# Altium PCB nrf52832_qfax_nfc.PcbDoc
Units mil, origin at the board's own origin, x right, y up, seen from the top; angles counter-clockwise.
Board outline 700 x 697 mil, 2 copper layers (Top Layer, Bottom Layer), stack 65.8 mil thick; 23 components, 46 nets, 96 pads, 61 vias.
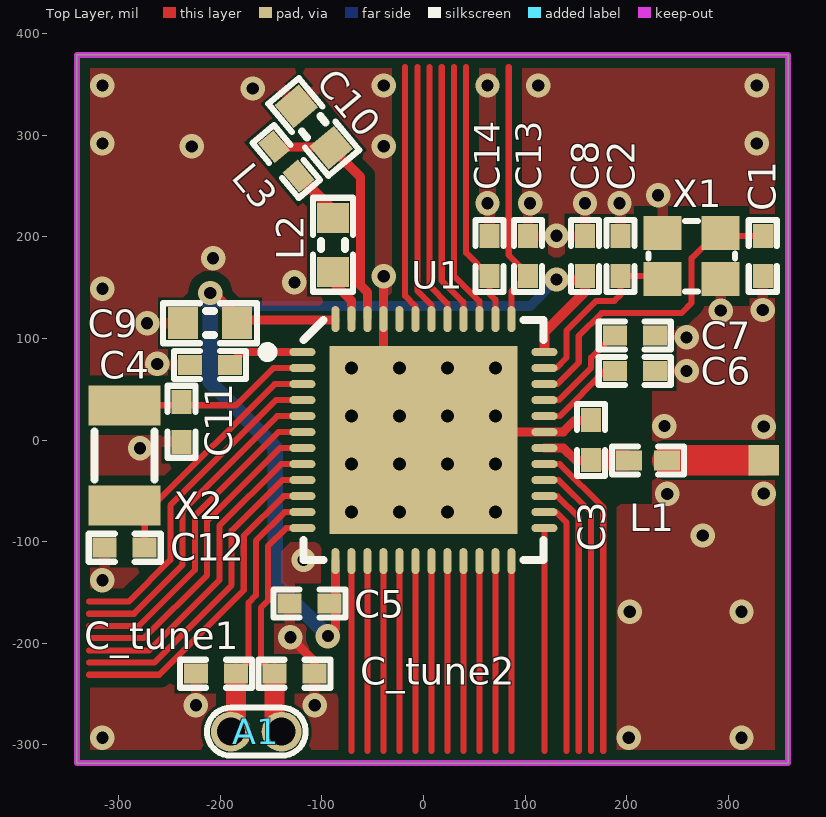
[diagram p0: Top Layer view]
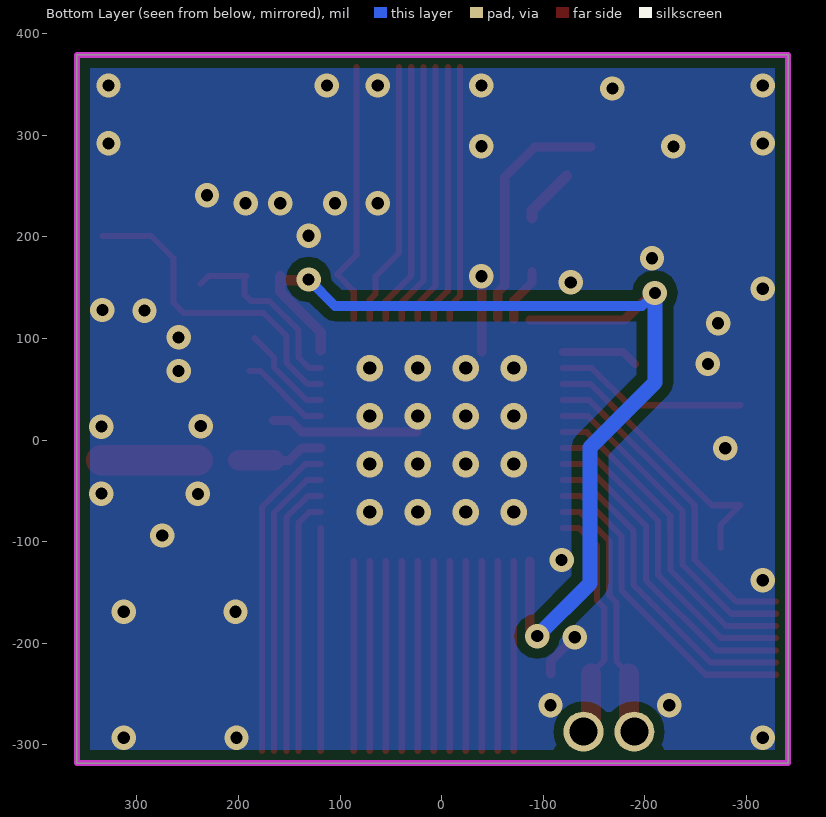
[diagram p1: Bottom Layer view, seen from below]
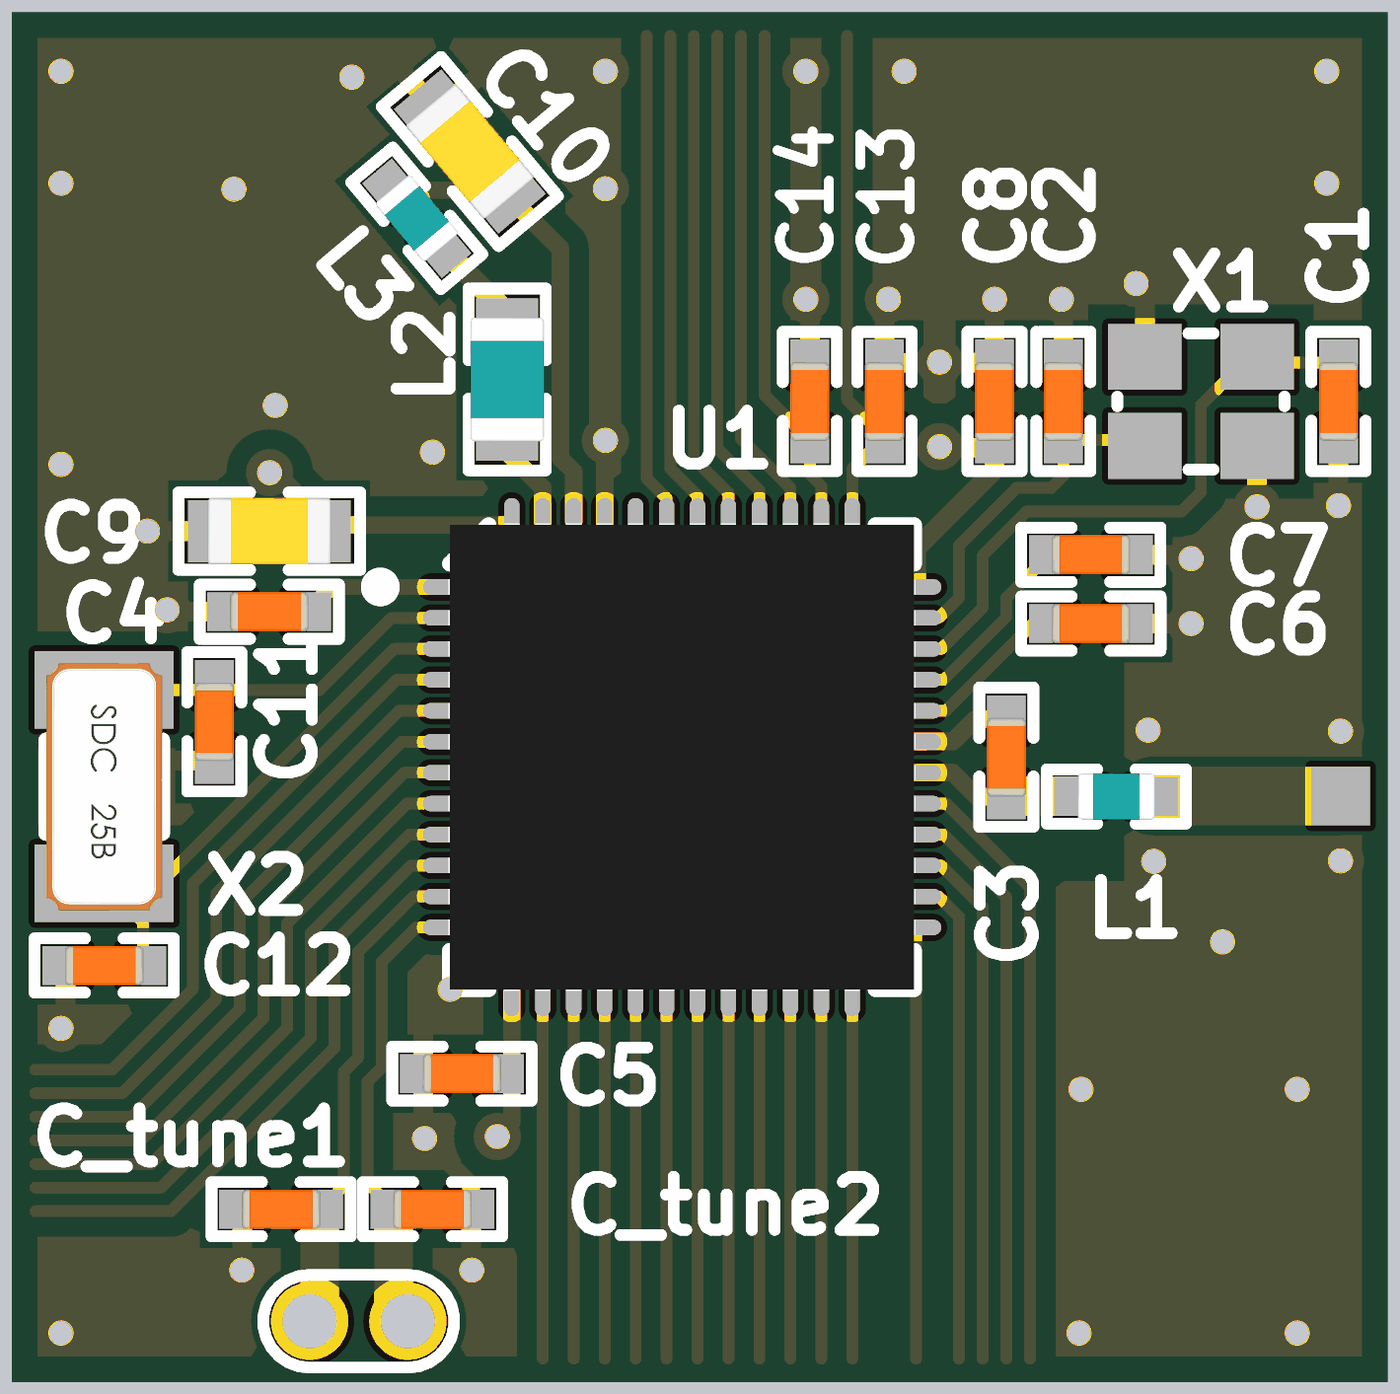
[diagram p2: 3D render of the assembled board from above, using the file's embedded part models]

## Layer stack, top to bottom
Top Solder: solder mask 0.4, Solder Resist, Dk 3.5
Top Layer: signal copper 1.4
Dielectric1: core 63, FR-4, Dk 4.8
Bottom Layer: signal copper 1.4
Bottom Solder: solder mask 0.4, Solder Resist, Dk 3.5

## Board outline
-341,-318 -341,379 359,379 359,-318

## Design rules (kind name [scope] priority, off if disabled: settings)
Clearance Polygon_ANT [(InNamedPolygon('Top_Layer-GND')) or (InNamedPolygon('Bottom_Layer-GND')) vs InNet('RF')] p1: gap=5
Clearance Polygon [(InNamedPolygon('Top_Layer-GND')) or (InNamedPolygon('Bottom_Layer-GND'))] p2: gap=10
Clearance [All] p3: gap=6
ComponentClearance [All] p1 off: gap=10 collisioncheckmode=3 verticalgap=10 showdistances=FALSE
FabricationTestPointUsage TestPointUsage [All] p1: valid=0 allowmultiple=FALSE
FabricationTestpoint Testpoint [All] p1: side=3 testpointundercomponent=TRUE minsize=40 maxsize=100 preferedsize=60 minholesize=0 maxholesize=40 preferedholesize=32 testpointgrid=1 allowsidetop=TRUE allowsidebottom=TRUE usegrid=TRUE gridtolerance=0.01
Height [All] p1 off: minheight=0 maxheight=1000 prefheight=500
HoleSize [All] p1: absolutevalues=TRUE maxlimit=160 minlimit=11.81 maxpercent=80.000 minpercent=20.000
MinimumAnnularRing [All] p1 off: minimumring=6
PolygonConnect PolygonConnect_1 [isVia and innet(gnd)] p1: connectstyle=Direct reliefconductorwidth=10 reliefentries=4 polygonreliefangle="90 Angle" airgapwidth=10
PolygonConnect [All] p2: connectstyle=Relief reliefconductorwidth=10 reliefentries=4 polygonreliefangle="90 Angle" airgapwidth=10
RoutingVias [All] p1: holewidth=16 width=32 viastyle="Through Hole" minholewidth=10 minwidth=10 maxholewidth=28 maxwidth=50
ShortCircuit ShortCircuit_NFC_ANT [InNet('NFC1') vs InNet('NFC2')] p1: allowed=TRUE
ShortCircuit [All] p2: allowed=FALSE
SilkToSolderMaskClearance SilkscreenOverComponentPads [IsPad] p1: minsilkscreentomaskgap=10 clearancetoexposedcopper=TRUE
SolderMaskExpansion [All] p1: expansion=3
Width [All] p1: maxlimit=100 minlimit=6 preferedwidth=6
23 further rules are at their usual default settings.

## Components (designator, comment, footprint, x,y, rotation, side; value= is the part's Value field where it differs from the comment)
A1 "NFC Antenna" TP_2x1mm_TH -164.5,-287 r90 top
C1 "12pF" CAPC1005X04L 333.99,181.01 r270 top
C2 "12pF" CAPC1005X04L 193.99,181.01 r90 top
C3 "0.8pF" CAPC1005X04L 165,0 r270 top
C4 "100nF" CAPC1005X04L -210,74 r180 top
C5 "100nF" CAPC1005X04L -112,-161 r180 top
C6 "N.C." CAPC1005X04L 208,68 r180 top
C7 "100pF" CAPC1005X04L 208,103 r0 top
C8 "100nF" CAPC1005X04L 158.99,181.01 r90 top
C9 "4.7µF" CAPC1608X06L -210,115 r180 top
C10 "1.0µF" CAPC1608X06L -107.97,308.2 r310 top
C11 "12pF" CAPC1005X04L -238,18 r270 top
C12 "12pF" CAPC1005X04L -294,-106 r180 top
C13 "12pF" CAPC1005X04L 103,181.01 r90 top
C14 "12pF" CAPC1005X04L 65,181.01 r90 top
C_tune1 "TBD" CAPC1005X04L -204,-230 r180 top
C_tune2 "TBD" CAPC1005X04L -127,-230 r180 top
L1 "3.9nH" INDC1005X04L 221,-20 r0 top
L2 "10µH" INDC1608X06L -89,192.2 r270 top
L3 "15nH" INDC1005X04L -134.97,274.2 r310 top
U1 "nRF52832-QFAA" QFN40P600X600X90-48N 0,0 r0 top locked
X1 "32MHz" BT-XTAL_2016 263.99,181.01 r180 top
X2 "32.768kHz" XTAL_3215 -294,-15 r270 top

## Footprints (in the part's own frame and the unit in brackets; to place one, negate y for a bottom-side part, rotate by r counter-clockwise, add the part's x,y. Pads: shape width x height; smd on the part's side, far side on the other; paste and mask are expansions set on the pad)
BT-XTAL_2016 [mm] "Crystal 2.0 x 1.6 mm"
  rect 0.95x0.85 smd: 1(-0.725,-0.575) 2(0.725,-0.575) 3(0.725,0.575) 4(-0.725,0.575)
  silkscreen extent -1.08,-0.88 1.08,0.88
CAPC1005X04L [mm] "Chip Capacitor, 2-Leads, Body 1.0x0.5mm, IPC High Density"
  rect 0.6x0.5 smd: 1(-0.5,0) 2(0.5,0)
  silkscreen extent -0.9,-0.35 0.9,0.35, body extent -0.51,-0.25 0.51,0.25, height 0.5
CAPC1608X06L [mm] "Chip Capacitor, 2-Leads, Body 1.6x0.8mm, IPC High Density"
  rect 0.75x0.8 smd: 1(-0.675,0) 2(0.675,0)
  silkscreen extent -1.17,-0.5 1.17,0.5, body extent -0.8,-0.43 0.8,0.43, height 0.8
INDC1005X04L [mm] "Chip Inductor, 2-Leads, Body 1.0x0.5mm, IPC High Density"
  rect 0.65x0.5 smd: 1(-0.475,0) 2(0.475,0)
  silkscreen extent -0.9,-0.35 0.9,0.35, body extent -0.5,-0.3 0.5,0.3, height 0.5
INDC1608X06L [mm] "Chip Inductor, 2-Leads, Body 1.6x0.8mm, IPC High Density"
  rect 0.75x0.8 smd: 1(-0.675,0) 2(0.675,0)
  silkscreen extent -1.18,-0.5 1.17,0.5, body extent -0.8,-0.48 0.8,0.48, height 0.8
QFN40P600X600X90-48N [mm] "QFN, 48-Leads, Body 6,0x6,0mm (max), Pitch 0,40mm, IPC Medium Density"
  oval 0.65x0.2 smd: 1(-3.025,2.2) 2(-3.025,1.8) 3(-3.025,1.4) 4(-3.025,1) 5(-3.025,0.6) 6(-3.025,0.2) 7(-3.025,-0.2) 8(-3.025,-0.6) 9(-3.025,-1) 10(-3.025,-1.4) 11(-3.025,-1.8) 12(-3.025,-2.2) 25(3.025,-2.2) 26(3.025,-1.8) 27(3.025,-1.4) 28(3.025,-1) 29(3.025,-0.6) 30(3.025,-0.2) 31(3.025,0.2) 32(3.025,0.6) 33(3.025,1) 34(3.025,1.4) 35(3.025,1.8) 36(3.025,2.2)
  oval 0.2x0.65 smd: 13(-2.2,-3.025) 14(-1.8,-3.025) 15(-1.4,-3.025) 16(-1,-3.025) 17(-0.6,-3.025) 18(-0.2,-3.025) 19(0.2,-3.025) 20(0.6,-3.025) 21(1,-3.025) 22(1.4,-3.025) 23(1.8,-3.025) 24(2.2,-3.025) 37(2.2,3.025) 38(1.8,3.025) 39(1.4,3.025) 40(1,3.025) 41(0.6,3.025) 42(0.2,3.025) 43(-0.2,3.025) 44(-0.6,3.025) 45(-1,3.025) 46(-1.4,3.025) 47(-1.8,3.025) 48(-2.2,3.025)
  rect 4.7x4.7 smd: 49(0,0)
  silkscreen extent -4.02,-3 3,3, body extent -3.02,-3.02 3.02,3.02, height 0.86
TP_2x1mm_TH [mm]
  round 1 hole 0.7: 1(0,-0.635) 2(0,0.635)
  silkscreen extent -0.6,-1.23 0.6,1.23
XTAL_3215 [mm] "XTAL SMD 3.2 x 1.5 mm"
  rect 1x1.8 smd: 1(-1.25,0) 2(1.25,0)
  silkscreen extent -0.6,-0.75 0.6,0.75, body extent -1.6,-0.75 1.6,0.75, height 0.81

## Part data
A1: library part NFC_ANT_TP
C1 C2 C11 C12 C13 C14: library part C0402-12p, "Capacitor, NP0, ±2%"
C3: library part C0402-0.8p, "Capacitor, NP0, ±5%"
C4 C5 C8: library part C0402-100n, "Capacitor, X7R, ±10%"
C6: library part C0402-N.C., "Not mounted"
C7: library part C0402-100p, "Capacitor, NP0, ±5%"
C9: library part C0603-4µ7, "Capacitor, X5R, ±10%"
C10: library part C0603-1µ0, "Capacitor, X7R, ±10%"
C_tune1 C_tune2: library part C0402-TBD, "Capacitor, NP0, ±5%"
L1: library part L0402-3n9, "High frequency chip inductor ±5%"
L2: library part L0603-10µ, "Chip inductor, IDC,min = 50 mA, ±20%"
L3: library part L0402-15n, "High frequency chip inductor ±10%"
U1: "Multi-protocol Bluetooth Low Energy, ANT and 2.4GHz proprietary system-on-chip"
X1: library part XTAL_SMD2016_32MHz_8pF_General, "XTAL SMD 2016, 32MHz, Cl=8pF, Total Tol: ±40ppm"
X2: library part XTAL_SMD3215_32.768kHz_9pF_General, "XTAL SMD 3215, 32.768kHz, Cl=9pF, Total Tol: ±50ppm"

## Free pads (board coordinates)
  rect 30x30 smd: 0(335,-19.75)

## Via types
v1: diameter 24, hole 12, Top Layer to Bottom Layer, tented both sides, 45 vias
v2: diameter 25.98, hole 12.99, Top Layer to Bottom Layer, tented both sides, 16 vias

## Nets (pads, with @x,y where several pads share a name; then routed paths per layer and width w, separated by ;. In a path a pad name is that pad's centre, name@x,y a point inside that pad or via, vN(x,y) a via of type N, cw(c..) or ccw(c..) an arc to the next point about the centre after c; other vN are vias at no path point)
DEC1: C4.1 U1.1 | length 76
  Top Layer w8: C4.1@-190.16,74.76 -178.31,86.61 U1.1
DEC2: C6.2 U1.32 | length 88.3
  Top Layer w6: U1.32 134.3,23.62 178.67,68 C6.2@189,68
DEC3: C7.1 U1.33 | length 96
  Top Layer w6: U1.33 133.07,39.37 165,71.3 165,81.19 C7.1@184.06,100.25
DEC4: C10.2 L3.1 U1.46 | length 237.8
  Top Layer w9: L3.1 C10.2@-91.57,288.53 ; C10.2 -62,258.95 -62,152.2 -55.12,145.32 U1.46@-55.12,120.3
GND: C1.2 C2.2 C3.1 C4.2 C5.2 C6.1 C7.2 C8.2 C9.2 C10.1 C11.2 C12.2 C13.2 C14.2 C_tune1.2 C_tune2.1 U1.31 U1.45 U1.49 X1.2 X1.4 | length 266.1
  Top Layer w9: v1(-131,-194) -107.32,-217.69 C_tune2.1 ; U1.49@-39.37,86.61 U1.45 v1@-39.37,161.2 ; U1.49@24.31,8 137.77,8 149.06,19.3 C3.1@165.31,19.3
  other v1: -316,-293 202,-293 313,-293 -224,-261 -107,-261 203,-169 313,-169 -316,-138 -118,-118.11 275,-94 240,-53 335,-52.75 -279,-8 335,13.25 237.16,13.76 259,68 -262,75 259,101 -272,115 292.54,127.37 334,128 -316,149 -127,155.2 -39,161.2 -207,179 130.99,201.01 63,233 105,233 159,233 193,233 231,241.01 -228,289 -39,289.2 -316,292 328,292 -168,346 -316,349 -39,349 63,349 113,349 328,349
  other v2: -70.87,-70.87 -23.62,-70.87 23.62,-70.87 70.87,-70.87 -70.87,-23.62 -23.62,-23.62 23.62,-23.62 70.87,-23.62 -70.87,23.62 -23.62,23.62 23.62,23.62 70.87,23.62 -70.87,70.87 -23.62,70.87 23.62,70.87 70.87,70.87
NetC3_2: C3.2 L1.1 U1.30 | length 86.6
  Top Layer w9: U1.30 137.79,-7.87 149.99,-20.07 C3.2@165.32,-20.07
  Top Layer w20: C3.2@165,-19.87 L1.1@200.31,-19.87
NetL2_1: L2.1 L3.2 | length 55.2
  Top Layer w11: L3.2 -89,225.92 L2.1
NetL2_2: L2.2 U1.47 | length 54
  Top Layer w9: L2.2 -89,155.2 -70.87,137.07 U1.47
NFC1: A1.2 C_tune1.1 U1.11 | length 255.4
  Top Layer w6: C_tune1.1@-184.01,-230.01 -172,-218 -172,-159.97 -164.85,-152.82 -164.85,-144 -164.85,-99.25 -136.47,-70.87 U1.11
  Top Layer w19.68: A1.2 -184.32,-281.82 C_tune1.1
NFC2: A1.1 C_tune2.2 U1.12 | length 235.3
  Top Layer w6: C_tune2.2 -160,-216.69 -160,-165 -152.85,-157.85 -152.85,-104.22 -135.25,-86.61 U1.12
  Top Layer w19.69: C_tune2.2 -146.69,-279.81 A1.1
P0.00/XL1: C11.1 U1.2 X2.1 | length 190.1
  Top Layer w6: X2.1 -184.36,34.21 -147.71,70.87 U1.2
P0.01/XL2: C12.1 U1.3 X2.2 | length 274.3
  Top Layer w6: C12.1 -274.32,-83.9 X2.2 -265.82,-64.21 -146.49,55.12 U1.3
P0.02/AIN0: U1.4 | length 323.5
  Top Layer w6: -329,-159 -290,-159 -249,-118 -249,-64.39 -145.24,39.37 U1.4
P0.03/AIN1: U1.5 | length 321.9
  Top Layer w6: -329,-171 -285.03,-171 -236.98,-122.95 -236.98,-69.37 -143.98,23.62 U1.5
P0.04/AIN2: U1.6 | length 320.3
  Top Layer w6: -329,-183 -280.06,-183 -224.98,-127.92 -224.98,-91.02 -224.96,-74.35 -142.73,7.87 U1.6
P0.05/AIN3: U1.7 | length 318.7
  Top Layer w6: -329,-195 -275.09,-195 -212.98,-132.89 -212.98,-100.12 -212.85,-100 -212.85,-79.37 -141.36,-7.87 U1.7
P0.06: U1.8 | length 317.2
  Top Layer w6: -329,-207 -270,-207 -200.85,-137.85 -200.85,-84.34 -140.14,-23.62 U1.8
P0.07: U1.9 | length 315.7
  Top Layer w6: -329,-219 -265,-219 -188.85,-142.85 -188.85,-89.31 -138.92,-39.37 U1.9
P0.08: U1.10 | length 314.1
  Top Layer w6: -329,-231 -260,-231 -176.85,-147.85 -176.85,-94.28 -137.7,-55.12 U1.10
P0.11: U1.14 | length 186.9
  Top Layer w6: -70.87,-306 U1.14
P0.12: U1.15 | length 186.9
  Top Layer w6: -55.12,-306 U1.15
P0.13: U1.16 | length 186.9
  Top Layer w6: -39.37,-306 U1.16
P0.14: U1.17 | length 186.9
  Top Layer w6: -23.62,-306 U1.17
P0.15: U1.18 | length 186.9
  Top Layer w6: -7.87,-306 U1.18
P0.16: U1.19 | length 186.9
  Top Layer w6: 7.87,-306 U1.19
P0.17: U1.20 | length 186.9
  Top Layer w6: 23.62,-306 U1.20
P0.18: U1.21 | length 186.9
  Top Layer w6: 39.37,-306 U1.21
P0.19: U1.22 | length 186.9
  Top Layer w6: 55.12,-306 U1.22
P0.20: U1.23 | length 186.9
  Top Layer w6: 70.87,-306 U1.23
P0.21: U1.24 | length 186.9
  Top Layer w6: 86.61,-306 U1.24
P0.22: U1.27 | length 272.4
  Top Layer w6: U1.27 131.85,-55.12 152.89,-76.16 152.89,-306
P0.23: U1.28 | length 293.8
  Top Layer w6: U1.28 133.07,-39.37 165,-71.3 165,-306
P0.24: U1.29 | length 315.3
  Top Layer w6: U1.29 134.3,-23.62 177,-66.33 177,-306
P0.25: C13.1 U1.37 | length 262.6
  Top Layer w6: 84,367 84,182 103,163 86.61,146.62 U1.37
P0.26: C14.1 U1.38 | length 259.6
  Top Layer w6: 42,367 42,184.32 C14.1 ; C14.1@64.99,161.01 64.99,143.94 70.87,138.06 U1.38
P0.27: U1.39 | length 258.3
  Top Layer w6: 30,367 30,161.94 55.12,136.82 U1.39
P0.28/AIN4: U1.40 | length 256.8
  Top Layer w6: 18,367 18,156.97 39.37,135.6 U1.40
P0.29/AIN5: U1.41 | length 255.2
  Top Layer w6: 6,367 6,151.93 23.62,134.31 U1.41
P0.30/AIN6: U1.42 | length 253.7
  Top Layer w6: -6,367 -6,146.96 7.87,133.09 U1.42
P0.31/AIN7: U1.43 | length 252.1
  Top Layer w6: -18,367 -18,141.99 -7.87,131.86 U1.43
RF: L1.2 pad.0 | length 95
  Top Layer w30: L1.2@240.02,-19.75 pad.0
SWDCLK: U1.25 | length 219.4
  Top Layer w6: 119.09,-306 U1.25
SWDIO: U1.26 | length 250.8
  Top Layer w6: U1.26 130.5,-70.87 140.89,-81.26 140.89,-306
VDD_NRF: C5.1 C8.1 C9.1 U1.13 U1.36 U1.48 | length 1074.6
  Top Layer w9: v1(-209.84,144.76) -206.58,144.76 -179.92,118.11 U1.48@-87,118.11 ; v1(-94,-193) -86.61,-185.61 U1.13
  Top Layer w10: U1.36@119.09,88 119.09,106.09 159,146 C8.1@159,160.34 ; v1(130.99,158.01) 131.68,157.32 158.99,157.32 C8.1
  Bottom Layer w10: v1(-209.84,144.76) -197.08,132 104.99,132 v1(130.99,158.01)
  Bottom Layer w15: v1(-209.84,144.76) -209.84,56.66 -145.95,-7.24 -145.95,-141.05 v1(-94,-193)
XC1: C1.1 U1.34 X1.1 | length 316.4
  Top Layer w6: U1.34 131.85,55.12 152.89,76.16 152.89,102.47 175.42,125 253.99,125 263.99,135.01 263.99,179.01 285.68,200.69 C1.1
XC2: C2.1 U1.35 X1.3 | length 187.2
  Top Layer w6: U1.35 130.5,70.87 140.89,81.26 140.89,107.89 170,137 188,137 193.99,142.99 C2.1@193.99,161.01 ; C2.1@191.99,161.32 229.66,161.32 X1.3@237.53,153.45
pads on no net: U1.44

## Polygon pours and split planes (outlines as drawn)
GND on Top Layer "Top_Layer-GND" (solid, remove dead copper, pour order 1000): -353,410 -353,-341 363,-341 363,410
GND on Bottom Layer "Bottom_Layer-GND" (solid, remove dead copper, pour order 1001): -373,400 -373,-341 394,-341 394,400

## Keep-outs
Keep-Out Layer:
  the board outline again, w6

## Other copper
Top Layer:
  pour cut-out: 225,-63 117,-63 117,51 225,51

## Silkscreen, mask and mechanical layers (free items; w line width, h text height)
Mechanical 1:
  the board outline again, w6

## Dimensions
359,379 to 359,-318 on Mechanical 3
-341,-318 to 359,-318 on Mechanical 3